# EAGLE board Gamebadge3_revB (EAGLE 8.7.1)
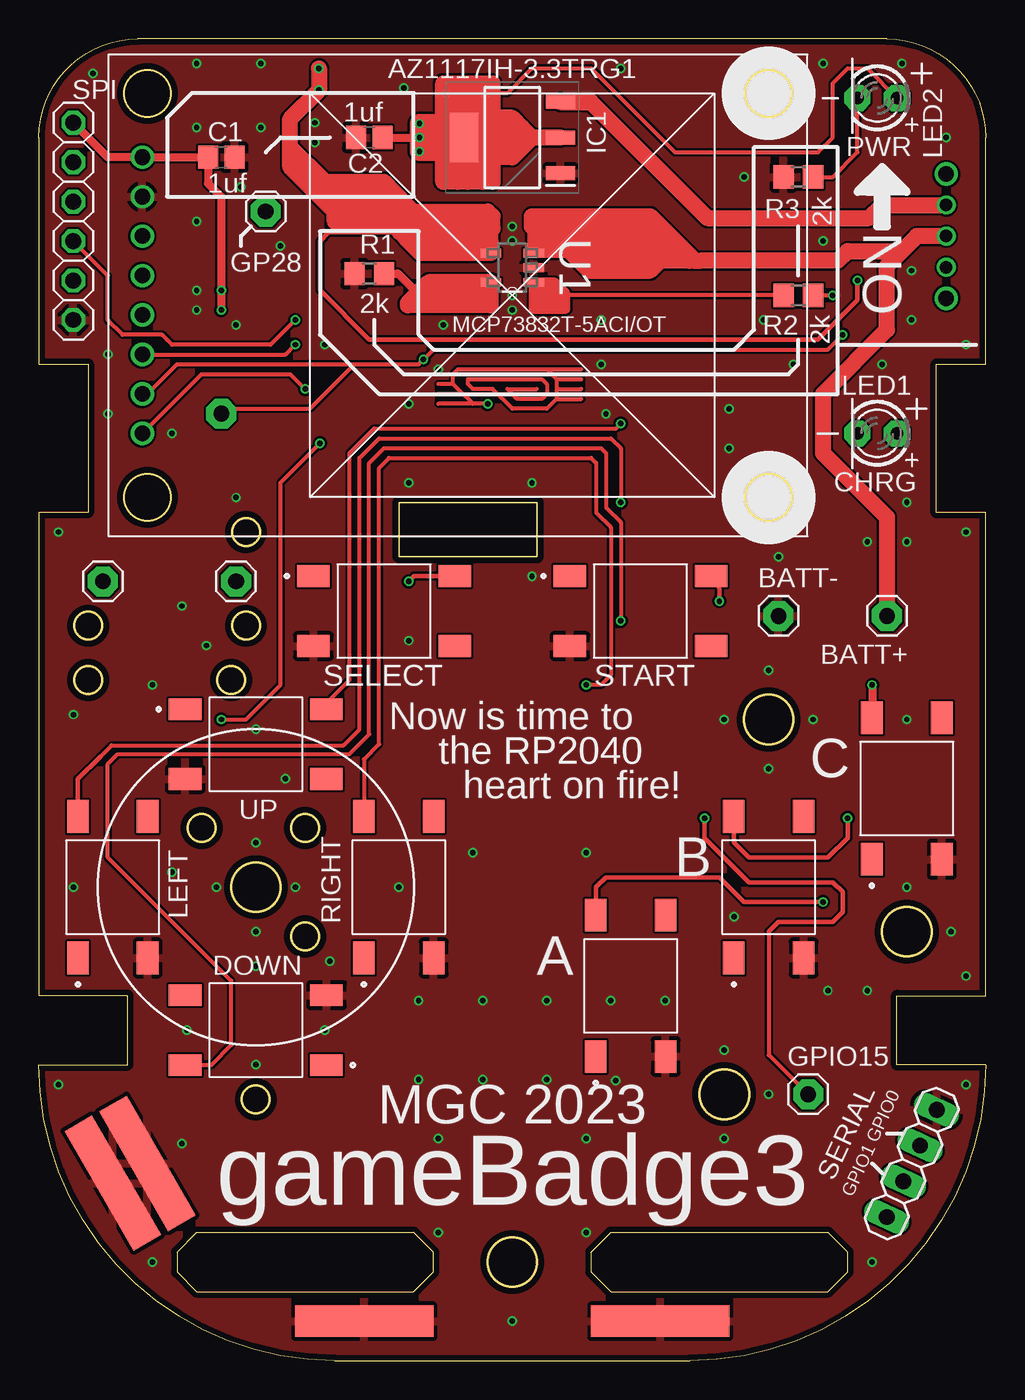
[diagram p0: board, top side]
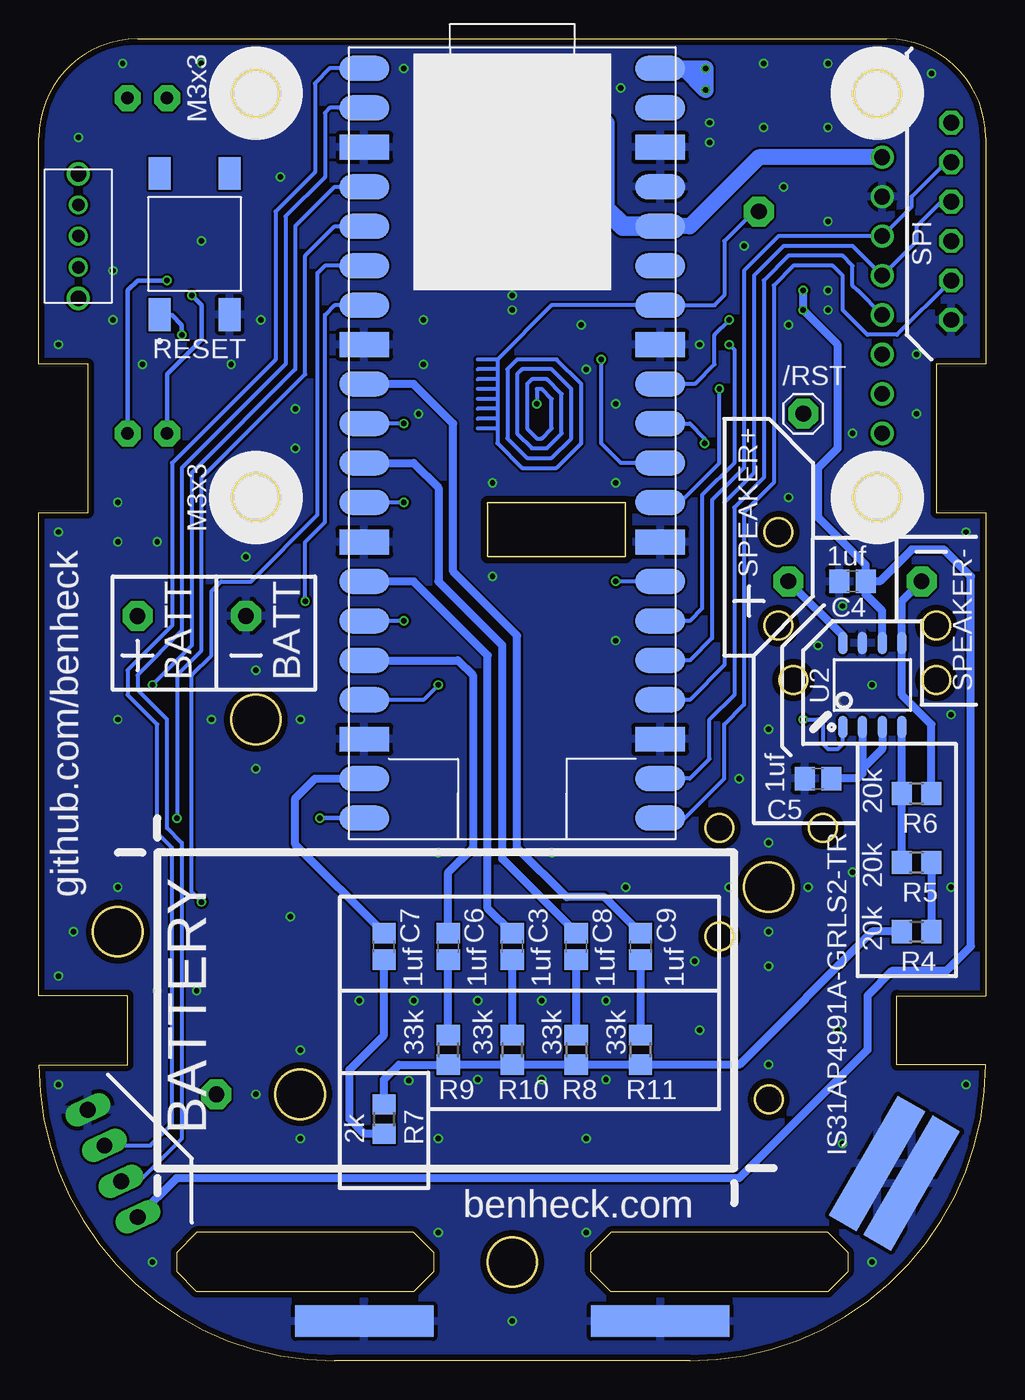
[diagram p1: board, bottom side, seen from below]

Size 60.96 x 85.09 mm. Coordinates in mm from the lower left corner, seen from the top.
Outline: 60.96,23.5 60.96,54.61 57.78,54.61 57.78,64.14 60.96,64.14 60.96,78.74 arc90 54.61,85.09 6.35,85.09 arc90 0,78.74 0,64.14 3.18,64.14 3.18,54.61 0,54.61 0,23.5 5.71,23.5 5.71,19.05 0,19.05 arc90 19.05,0 41.91,0 arc90 60.96,19.05 55.25,19.05 55.25,23.5 60.96,23.5
Outline: 36.83,8.26 50.8,8.26 52.07,6.98 52.07,5.72 50.8,4.45 36.83,4.45 35.56,5.72 35.56,6.98 36.83,8.26
Outline: 10.16,8.26 24.13,8.26 25.4,6.98 25.4,5.72 24.13,4.45 10.16,4.45 8.89,5.72 8.89,6.98 10.16,8.26
Outline: 32.07,51.75 32.07,55.25 23.18,55.25 23.18,51.75 32.07,51.75
Outline: circle at 13.97,30.48 radius 1.59
Outline: circle at 30.48,6.35 radius 1.59
Outline: circle at 55.88,27.62 radius 1.59
Outline: circle at 46.99,41.28 radius 1.59
Outline: circle at 44.13,17.15 radius 1.59
Outline: circle at 13.34,47.31 radius 0.89
Outline: circle at 12.38,43.82 radius 0.89
Outline: circle at 3.18,47.31 radius 0.89
Outline: circle at 3.18,43.82 radius 0.89
Outline: circle at 13.34,53.34 radius 0.89
Outline: circle at 17.14,34.29 radius 0.89
Outline: circle at 17.14,27.31 radius 0.89
Outline: circle at 13.97,16.83 radius 0.89
Outline: circle at 10.48,34.29 radius 0.89
Copper layers (1*16): Top 0.035559375mm / dielectric 1.6mm / Bottom 0.035559375mm
Design rules "oshpark-2layer": minimum track width 6mil, minimum drill 10mil, track to track 6mil, track to pad 6mil, pad to pad 6mil, via to via 6mil, smd to smd 6mil, copper to edge 15mil, drill to drill 6mil, minimum pad ring 5mil, minimum via ring 5mil, stop-mask expansion 2.5mil, vias tented up to drill 0mil, thermal gap 10mil

## Footprints (pad centres in the part's own frame; a part is rotated, then mirrored left to right if it is on the bottom)
1X01 = drill 1.016 pad 1.93 octagon: 1 0,0
SW_TS04-66-50-BK-100-SMT = smd 2.1 x 1.4: 1 -4.55,2.25; 2 -4.55,-2.25; 3 4.55,2.25; 4 4.55,-2.25
C0805 = smd 1.3 x 1.5: 1 -0.85,0; 2 0.85,0
SOT230P700X170-4N = smd 1.85 x 0.9: 1 -3.1,2.3; 2 -3.1,0; 3 -3.1,-2.3 | smd 1.85 x 3.2: 4 3.1,0
LED3MM = drill 0.813 pad 1.676 octagon: A -1.27,0; K 1.27,0
R0805 = smd 1.3 x 1.5: 1 -0.95,0; 2 0.95,0
1X04 = drill 1.016 long: 1 -3.81,0; 2 -1.27,0; 3 1.27,0; 4 3.81,0
1X06 = drill 1.016 octagon: 1 -6.35,0; 2 -3.81,0; 3 -1.27,0; 4 1.27,0; 5 3.81,0; 6 6.35,0
SOT95P300X145-5N = smd 1.321 x 0.559: 1 -1.372,0.94; 2 -1.372,0; 3 -1.372,-0.94; 4 1.372,-0.94; 5 1.372,0.94
SOIC127P604X170-8N = smd 1.45 x 0.6: 1 -2.7,1.905; 2 -2.7,0.635; 3 -2.7,-0.635; 4 -2.7,-1.905; 5 2.7,-1.905; 6 2.7,-0.635; 7 2.7,0.635; 8 2.7,1.905
GND_CLIP = smd 8.89 x 2.032: P$1 0,0 | smd 8.89 x 2.032 bottom: P$2 0,0
1825232-1 = drill 0.8: 1 -2,0; 2 0,0; 3 2,0 | drill 1: GND -4,0; GND1 4,0
ST7789_WAVE = drill 1: P$1 -23.82,8.89; P$2 -23.82,6.35; P$3 -23.82,3.81; P$4 -23.82,1.27; P$5 -23.82,-1.27; P$6 -23.82,-3.81; P$7 -23.82,-6.35; P$8 -23.82,-8.89
RPI_PICO_W = smd 3.2 x 1.6: 3V3 9.525,13.97; 3V3_EN 9.525,16.51; ADC_VREF 9.525,11.43; AGND 9.525,6.35; GND@1 -9.525,19.05; GND@2 -9.525,6.35; GND@3 -9.525,-6.35; GND@4 -9.525,-19.05; GND@6 9.525,-19.05; GND@7 9.525,-6.35; GND@8 9.525,19.05; GP0 -9.525,24.13; GP1 -9.525,21.59; GP2 -9.525,16.51; GP3 -9.525,13.97; GP4 -9.525,11.43; GP5 -9.525,8.89; GP6 -9.525,3.81; GP7 -9.525,1.27; GP8 -9.525,-1.27; GP9 -9.525,-3.81; GP10 -9.525,-8.89; GP11 -9.525,-11.43; GP12 -9.525,-13.97; GP13 -9.525,-16.51; GP14 -9.525,-21.59; GP15 -9.525,-24.13; GP16 9.525,-24.13; GP17 9.525,-21.59; GP18 9.525,-16.51; GP19 9.525,-13.97; GP20 9.525,-11.43; GP21 9.525,-8.89; GP22 9.525,-3.81; GP26_A0 9.525,1.27; GP27_A1 9.525,3.81; GP28_A2 9.525,8.89; RUN 9.525,-1.27; VBUS 9.525,24.13; VSYS 9.525,21.59

## Placement (x,y rotation side)
/RST  [1X01]  11.75,60.96 0 bottom
A  TS04-66-50-BK-100-SMT  [SW_TS04-66-50-BK-100-SMT]  38.1,24.13 90 top
B  TS04-66-50-BK-100-SMT  [SW_TS04-66-50-BK-100-SMT]  46.99,30.48 90 top
BATT+  [1X01]  54.61,47.94 180 top
BATT-  [1X01]  47.62,47.94 0 top
C  TS04-66-50-BK-100-SMT  [SW_TS04-66-50-BK-100-SMT]  55.88,36.83 90 top
C1  1uf  [C0805]  11.75,77.47 0 top
C2  1uf  [C0805]  21.27,78.74 180 top
C3  1uf  [C0805]  30.48,26.67 270 bottom
C4  1uf  [C0805]  8.57,50.17 180 bottom
C5  1uf  [C0805]  10.8,37.47 180 bottom
C6  1uf  [C0805]  34.61,26.67 270 bottom
C7  1uf  [C0805]  38.73,26.67 270 bottom
C8  1uf  [C0805]  26.35,26.67 270 bottom
C9  1uf  [C0805]  22.23,26.67 270 bottom
DOWN  TS04-66-50-BK-100-SMT  [SW_TS04-66-50-BK-100-SMT]  13.97,21.27 180 top
GP28  [1X01]  14.61,73.98 0 top
GPIO15  [1X01]  49.53,17.15 0 top
IC1  AZ1117IH-3.3TRG1  [SOT230P700X170-4N]  30.48,78.74 180 top
LED1  CHRG  [LED3MM]  53.98,59.69 180 top
LED2  PWR  [LED3MM]  53.98,81.28 180 top
LEFT  TS04-66-50-BK-100-SMT  [SW_TS04-66-50-BK-100-SMT]  4.76,30.48 90 top
R1  2k  [R0805]  21.27,69.98 0 top
R2  2k  [R0805]  48.89,68.58 180 top
R3  2k  [R0805]  48.89,76.2 180 top
R4  20k  [R0805]  4.45,27.62 180 bottom
R5  20k  [R0805]  4.45,32.07 0 bottom
R6  20k  [R0805]  4.45,36.51 0 bottom
R7  2k  [R0805]  38.73,15.56 270 bottom
R8  33k  [R0805]  26.35,20 90 bottom
R9  33k  [R0805]  34.61,20 90 bottom
R10  33k  [R0805]  30.48,20 90 bottom
R11  33k  [R0805]  22.23,20 90 bottom
RESET  TS04-66-50-BK-100-SMT  [SW_TS04-66-50-BK-100-SMT]  50.93,71.88 90 bottom
RIGHT  TS04-66-50-BK-100-SMT  [SW_TS04-66-50-BK-100-SMT]  23.18,30.48 90 top
SELECT  TS04-66-50-BK-100-SMT  [SW_TS04-66-50-BK-100-SMT]  22.23,48.26 0 top
SERIAL  [1X04]  56.2,12.7 65 top
SPEAKER+  [1X01]  12.7,50.17 0 top
SPEAKER-  [1X01]  4.13,50.17 0 top
SPI  [1X06]  2.22,73.34 270 top
START  TS04-66-50-BK-100-SMT  [SW_TS04-66-50-BK-100-SMT]  38.73,48.26 0 top
U1  MCP73832T-5ACI/OT  [SOT95P300X145-5N]  30.48,70.36 180 top
U2  IS31AP4991A-GRLS2-TR  [SOIC127P604X170-8N]  7.3,43.5 90 bottom
U$2  GND_CLIP  [GND_CLIP]  20.95,2.54 0 top
U$3  GND_CLIP  [GND_CLIP]  40.01,2.54 0 top
U$4  GND_CLIP  [GND_CLIP]  6.98,12.7 300 top
U$5  GND_CLIP  [GND_CLIP]  4.76,11.43 300 top
U$6  1825232-1  [1825232-1]  58.42,72.39 90 bottom
U$7  ST7789_CS  [ST7789_WAVE]  30.48,68.58 0 top
U$8  [RPI_PICO_W]  30.48,59.05 0 bottom
UP  TS04-66-50-BK-100-SMT  [SW_TS04-66-50-BK-100-SMT]  13.97,39.69 0 top

## Library data of the parts
/RST BATT+ BATT- C1-C9 GP28 GPIO15 LED1 LED2 SPEAKER+ SPEAKER- SPI = adafruit
A B C DOWN LEFT RESET RIGHT SELECT START UP = TS04-66-50-BK-100-SMT; AVAILABILITY: In Stock; CUI_PURCHASE_URL: https://www.cuidevices.com/product/switches/tactile-switches/ts04-series?utm_source=snapeda.com&utm_medium=referral&utm_campaign=snapedaBOM; DESCRIPTION: 6 x 6 mm, 4.3~9.5 mm Actuator Height, 100~260 gf, Surface Mount, SPST, Tactile Switch; MF: CUI Devices; MP: TS04-66-50-BK-100-SMT; PACKAGE: None; PRICE: None; PURCHASE-URL: https://pricing.snapeda.com/search/part/TS04-66-50-BK-100-SMT/?ref=eda
IC1 = AZ1117IH-3.3TRG1; AVAILABILITY: In Stock; DESCRIPTION: Linear Voltage Regulator IC Positive Fixed 1 Output 1A SOT-223-3; MF: Diodes Inc.; MP: AZ1117IH-3.3TRG1; PACKAGE: SOT-223 Diodes Inc.; PRICE: None; PURCHASE-URL: https://pricing.snapeda.com/search/part/AZ1117IH-3.3TRG1/?ref=eda
R1-R11 = resistor
SERIAL = pinhead
U1 = MCP73832T-5ACI_OT; AVAILABILITY: In Stock; DESCRIPTION: Charger IC Lithium Ion/Polymer SOT-23-5; MF: Microchip; MP: MCP73832T-5ACI/OT; PACKAGE: SOT-23 Microchip; PRICE: None; PURCHASE-URL: https://pricing.snapeda.com/search/part/MCP73832T-5ACI/OT/?ref=eda
U2 = IS31AP4991A-GRLS2-TR; AVAILABILITY: In Stock; DESCRIPTION: Audio Amp Speaker 1-CH Mono 1.4W Class-AB 8-Pin SOP T/R; MF: Lumissil Microsystems; MP: IS31AP4991A-GRLS2-TR; PACKAGE: None; PRICE: None; PURCHASE-URL: https://pricing.snapeda.com/search/part/IS31AP4991A-GRLS2-TR/?ref=eda
U$2-U$5 U$7 = MGC 2023
U$6 = switch 1825232-1; AVAILABILITY: In Stock; COMMENT: 1825232-1; DESCRIPTION: Switch Slide ON None ON SPDT Side Slide 0.2A 30VDC 10000Cycle PC Pins Bracket Mount/Through Hole; EU_ROHS_COMPLIANCE: Compliant; MF: TE Connectivity; MP: 1825232-1; PACKAGE: None; PRICE: None; PURCHASE-URL: https://pricing.snapeda.com/search/part/1825232-1/?ref=eda
U$8 = RaspberryPi_Pico W

## Nets
3V3: C1.1 C2.1 C4.1 IC1.2 IC1.4 LED2.A SERIAL.1 SPI.1 U2.6 U$7.P$1 U$8.3V3
A: A.3 U$8.GP4
ADC2: GP28.1 U$8.GP28_A2
AMP_EN: U2.1 U$8.GP26_A0
AUDIO: R4.2 R7.1 R8.1 R9.1 R10.1 R11.1
B: B.3 U$8.GP3
C: C.3 U$8.GP2
CHRG: LED1.K R2.1
DOWN: DOWN.3 U$8.GP11
GND: A.2 B.2 BATT-.1 C1.2 C2.2 C4.2 C5.2 C.2 DOWN.2 IC1.1 LEFT.2 R1.1 R3.2 RESET.2 RIGHT.2 SELECT.2 SERIAL.4 SPI.6 START.2 U1.2 U2.7 U$2.P$1 U$2.P$2 U$3.P$1 U$3.P$2 U$4.P$1 U$4.P$2 U$5.P$1 U$5.P$2 U$7.P$2 U$8.3V3_EN U$8.AGND U$8.GND@1 U$8.GND@2 U$8.GND@3 U$8.GND@4 U$8.GND@6 U$8.GND@7 U$8.GND@8 UP.2
LCD/CS: U$7.P$5 U$8.GP17
LEFT: LEFT.3 U$8.GP9
N$1: C5.1 U2.2 U2.3
N$2: /RST.1 RESET.1 U$7.P$7 U$8.RUN
N$3: U$7.P$6 U$8.GP20
N$4: R4.1 R5.2
N$5: U$7.P$8 U$8.GP22
N$6: R5.1 R6.1 U2.4
N$7: IC1.3 U$6.3
N$8: R6.2 SPEAKER-.1 U2.5
N$9: LED2.K R3.1
N$10: SPEAKER+.1 U2.8
N$11: C6.1 U$8.GP12
N$12: C7.1 U$8.GP14
N$13: C3.1 U$8.GP10
N$14: C6.2 R9.2
N$15: C7.2 R7.2
N$16: C8.1 U$8.GP8
N$17: C8.2 R8.2
N$18: C3.2 R10.2
N$20: U$8.ADC_VREF
N$21: GPIO15.1 U$8.GP15
N$22: C9.1 U$8.GP6
N$23: C9.2 R11.2
PROG: R1.2 U1.5
RIGHT: RIGHT.3 U$8.GP13
RX/SCL: SERIAL.2 U$8.GP1
SELECT: SELECT.3 U$8.GP21
SPI0_CLK: SPI.3 U$7.P$4 U$8.GP18
SPI0_MISO: SPI.5 U$8.GP16
SPI0_MOSI: SPI.2 U$7.P$3 U$8.GP19
SPI/CS: SPI.4 U$8.GP27_A1
START: START.3 U$8.GP5
STAT: R2.2 U1.1
TX/SDA: SERIAL.3 U$8.GP0
UP: U$8.GP7 UP.3
VBAT: BATT+.1 U1.3 U$6.2
VDD: LED1.A U1.4 U$8.VBUS

## Tracks (layer width: path | path; a pad name or v marks a point on that pad's centre or on a via)
3V3  (via drill 0.35)
  Top 0.254: LED2.A 53.34,83.19 52.07,83.19 51.12,82.23 51.12,78.74 50.16,77.79 40.96,77.79 35.56,83.19 31.75,83.19 30.16,81.6 28.57,81.6
  Top 0.508: C2.1 v24.51,78.74 | SPI.1 4.45,77.47 U$7.P$1 C1.1 10.9,75.78 11.75,74.93 v11.75,68.9 v11.75,67.63
  Top 1.016: 31.75,78.74 26.04,78.74 | IC1.2 31.75,78.74 | 31.12,79.38 30.48,80.01 27.94,80.01 27.56,79.63 | IC1.4 28.02,79.38 31.12,79.38 | 31.12,79.38 31.75,78.74 | 31.75,78.74 30.48,77.47 27.94,77.47 27.94,78.11 30.48,78.11 | 26.04,78.74 26.04,79.63 26.04,82.23 26.99,82.23 | 26.99,82.23 27.62,82.23 | 27.62,82.23 28.57,82.23 | 28.57,82.23 29.21,82.23 29.21,75.88 28.57,75.88 | 28.57,75.88 27.62,75.88 | 27.62,75.88 26.99,75.88 | 26.99,75.88 26.04,75.88 26.04,78.74 | 26.99,82.23 26.99,75.88 | 27.62,75.88 27.62,82.23 | 28.57,82.23 28.57,81.6 28.57,75.88
  Top 1.27: v24.51,78.74 26.04,78.74 26.8,78.74 | v24.51,78.74 v24.51,79.63 26.04,79.63 27.56,79.63 27.3,79.38 27.3,77.85 v24.51,77.85 v24.51,78.74
  Bottom 0.508: U2.6 6.67,48.26 7.72,49.32 C4.1 | C4.1 7.72,51.22 10.8,54.29 10.8,57.47 9.53,58.74 9.53,65.41 v11.75,67.63 v11.75,68.9 | SERIAL.1 52.09,11.75 15.88,11.75 7.62,20 7.62,23.5 6.03,25.08 2.54,25.08 0.95,26.67 0.95,50.48 2.7,52.23 4.76,52.23 6.83,50.17 C4.1
  Bottom 1.016: U$7.P$1 14.61,77.47 19.05,73.03 U$8.3V3
  Bottom 1.27: v24.51,79.63 v24.51,78.74 v24.51,77.85 24.51,74.17 23.37,73.03 U$8.3V3
A  (via drill 0.35)
  Top 0.305: A.3 35.88,28.71 35.88,30.48 36.51,31.12 43.81,31.12 45.4,29.53 v50.48,29.53
  Bottom 0.254: U$8.GP4 42.55,70.48 43.02,70.01 43.02,54.45 47.31,50.17 49.21,50.17 49.85,49.53 49.85,45.4 51.12,44.13 51.12,30.16 v50.48,29.53
ADC2  (via drill 0.35)
  Top 0.254: v28.89,61.59 27.94,61.59 | 27.94,61.59 27.15,62.39 | 27.15,62.39 26.67,62.87 | 32.7,63.82 33.34,63.18 | 33.34,63.18 33.34,62.55 | 33.34,62.55 33.34,61.91 | 33.34,61.91 32.7,61.28 30.48,61.28 29.21,62.55 27.94,62.55 27.62,62.87 27.62,63.18 32.38,63.18 32.7,62.87 32.7,62.23 32.38,61.91 30.8,61.91 30.16,62.55 32.07,62.55 | 26.67,62.87 26.67,63.5 26.99,63.82 32.7,63.82 | 32.7,63.82 34.92,63.82 | 33.34,63.18 34.92,63.18 | 33.34,62.55 34.92,62.55 | 33.34,61.91 34.92,61.91 | 27.94,61.59 25.72,61.59 | 27.15,62.39 26.99,62.23 25.72,62.23 | 26.67,62.87 25.72,62.87
  Bottom 0.254: 31.43,64.45 27.94,67.95 U$8.GP28_A2 17.46,67.95 16.83,68.58 16.83,72.07 14.92,73.98 GP28.1 | 31.43,64.45 31.43,63.82 | 31.43,63.82 31.43,63.18 | 31.43,63.18 31.43,62.55 | 31.43,62.55 31.43,61.91 | 31.43,61.91 31.43,61.28 | 31.43,61.28 31.43,60.64 | 31.43,60.64 31.43,60.01 | 31.43,60.01 31.43,59.05 29.84,57.47 27.62,57.47 26.04,59.05 26.04,62.87 27.62,64.45 30.16,64.45 30.8,63.82 30.8,59.37 29.53,58.1 27.94,58.1 26.67,59.37 26.67,62.55 27.94,63.82 29.84,63.82 30.16,63.5 30.16,59.69 29.21,58.74 28.26,58.74 27.3,59.69 27.3,62.23 28.26,63.18 29.21,63.18 29.53,62.87 29.53,60.01 28.89,59.37 28.57,59.37 27.94,60.01 27.94,61.91 28.57,62.55 28.89,62.55 v28.89,61.59 | 31.43,64.45 32.7,64.45 | 31.43,63.82 32.7,63.82 | 31.43,63.18 32.7,63.18 | 31.43,62.55 32.7,62.55 | 31.43,61.91 32.7,61.91 | 31.43,61.28 32.7,61.28 | 31.43,60.64 32.7,60.64 | 31.43,60.01 32.7,60.01
AMP_EN  (via drill 0.35)
  Top 0.254: v11.75,41.28 13.34,41.28 15.56,43.5 15.56,56.52 v18.1,59.05
  Bottom 0.254: U$8.GP26_A0 19.05,60.33 18.1,59.37 v18.1,59.05 | v11.75,41.28 10.8,41.28 10.48,40.96 10.48,39.69 10.16,39.37 9.53,39.37 9.21,39.69 U2.1
AUDIO
  Bottom 0.508: R4.2 7.3,27.62 15.87,19.05 R11.1 R8.1 R10.1 R9.1 37.78,19.05 38.73,18.1 R7.1
B  (via drill 0.35)
  Top 0.305: B.3 44.74,33.37 45.72,32.39 50.8,32.39 52.07,33.66 v52.07,34.93
  Top 0.508: 44.77,34.61 44.77,35 B.3
  Bottom 0.254: U$8.GP3 41.91,73.03 43.81,71.12 43.81,63.5 50.48,56.83 50.48,45.72 52.07,44.13 v52.07,34.93
C  (via drill 0.35)
  Top 0.508: v53.66,43.5 53.66,41.41 C.3
  Bottom 0.254: U$8.GP2 41.91,75.56 44.45,73.03 44.45,63.82 51.12,57.15 51.12,46.04 v53.66,43.5
CHRG  (via drill 0.35)
  Top 0.254: R2.1 v51.12,68.58
  Bottom 0.305: LED1.K 52.7,63.5 50.48,65.72 50.48,67.95 v51.12,68.58
DOWN  (via drill 0.35)
  Top 0.254: DOWN.3 11.09,19.02 12.38,20.32 12.38,24.45 4.45,32.39 4.45,38.42 5.08,39.05 20,39.05 21.27,40.32 21.27,57.79 22.23,58.74 36.2,58.74 36.51,58.42 36.51,54.93 37.47,53.98 v37.47,47.62
  Bottom 0.254: v37.47,47.62 U$8.GP11
GND  (via drill 0.35)
  other vias: 10.16,79.38 30.48,72.07 30.48,73.03 30.48,68.58 30.48,67.63 17.78,78.42 10.16,67.63 10.16,68.9 10.16,73.34 14.29,83.5 14.29,79.38 12.7,66.67 4.45,60.96 8.57,59.69 12.7,55.56 24.45,23.18 28.57,23.18 32.7,23.18 36.83,23.18 24.45,18.1 28.57,18.1 32.7,18.1 37.15,18.03 47.62,51.75 44.45,58.74 53.34,52.71 55.88,55.25 55.88,41.28 23.81,56.52 31.75,56.52 23.81,61.59 25.72,63.82 36.51,60.96 36.2,66.99 56.2,66.99 23.5,81.92 37.47,83.19 50.48,83.5 46.67,66.99 54.29,64.14 8.57,31.43 2.22,41.59 18.73,25.72 13.97,25.4 10.8,46.04 13.97,19.05 2.22,30.48 9.21,13.97 25.72,8.26 35.24,8.26 53.66,6.35 7.3,6.35 1.27,17.78 59.69,17.78 59.69,24.77 30.48,2.54 50.8,23.81 53.34,23.81 44.13,41.28 23.18,30.48 4.45,64.77 3.49,82.87 45.4,76.2 56.2,70.17 23.81,46.36 13.97,40.64 55.56,83.5 55.88,52.71 48.58,64.14 25.72,14.29 35.24,14.29 9.53,21.27 18.41,21.27 13.97,27.62 13.97,33.34 11.43,30.48 16.51,30.48 27.94,32.7 35.24,32.7 40.32,23.18 46.99,44.45 46.99,38.1 31.75,50.48 15.56,71.75 26.04,66.67 36.2,64.14 44.45,61.28 15.88,37.47 50.48,72.07 7.3,43.5 9.21,48.58 1.27,53.34 13.02,75.56 18.41,65.41 17.78,79.69 10.16,83.5 49.85,41.28 44.77,28.58 44.13,20 44.13,14.29 46.99,17.15 55.88,30.48 58.74,27.62 59.69,53.34 59.69,65.41 58.42,78.74
  pour Top: -12.7,96.52 78.74,96.52 78.74,-7.62 76.2,-10.16 -7.62,-10.16 -17.78,0 -17.78,91.44
  pour Bottom: -7.62,96.52 68.58,96.52 71.12,93.98 73.66,91.44 73.66,-7.62 68.58,-12.7 -10.16,-12.7 -15.24,-7.62 -15.24,93.98 -12.7,96.52
LCD/CS
  Bottom 0.254: U$7.P$5 8.25,68.9 8.57,69.22 8.57,70.48 9.21,71.12 12.7,71.12 14.29,69.53 14.29,56.83 16.19,54.93 16.19,42.86 17.78,41.28 17.78,38.73 19.05,37.47 U$8.GP17
LEFT  (via drill 0.35)
  Top 0.254: v37.47,55.25 37.47,58.74 36.83,59.37 21.91,59.37 20.64,58.1 20.64,40.64 19.61,39.61 4.68,39.61 3.97,38.89
  Top 0.305: LEFT.3 2.51,37.44 3.97,38.89
  Bottom 0.254: v37.47,55.25 U$8.GP9
N$1
  Bottom 0.508: U2.2 7.94,38.1 | 7.94,38.1 7.94,37.78 8.25,37.47 C5.1 | U2.3 6.67,39.37 7.94,38.1
N$2  (via drill 0.35)
  Top 0.254: U$7.P$7 6.98,62.23 8.89,64.14 20.32,64.14 | 20.32,64.14 24.45,64.14 v24.77,64.45 25.4,65.09 50.8,65.09 v51.75,66.04 | /RST.1 12.07,61.28 17.46,61.28 20.32,64.14
  Bottom 0.254: U$8.RUN 23.5,57.79 24.77,59.05 v24.77,64.45
  Bottom 0.305: v51.75,66.04 51.75,66.67 52.39,67.31 52.7,67.31
  Bottom 0.508: 52.7,67.31 53.16,67.31 RESET.1
N$3  (via drill 0.35)
  Top 0.254: U$7.P$6 15.88,64.77 v16.51,65.41
  Bottom 0.254: U$8.GP20 19.05,47.62 18.26,48.42 18.26,55.72 16.19,57.79 16.19,65.09 v16.51,65.41
N$4
  Bottom 0.508: R5.2 R4.1
N$5  (via drill 0.35)
  Top 0.254: v17.14,62.55 16.19,63.5 10.47,63.5 U$7.P$8
  Bottom 0.254: v17.14,62.55 17.14,57.79 19.69,55.25 U$8.GP22
N$6
  Bottom 0.508: R5.1 R6.1 U2.4
N$7
  Top 1.016: IC1.3 33.59,81.03 35.56,81.03 43.04,73.55 53.45,73.55 54.29,74.39 U$6.3
N$8
  Bottom 0.508: R6.2 3.5,40.96 5.4,42.86 U2.5 5.4,48.9 SPEAKER-.1
N$9
  Top 0.254: R3.1 51.12,76.2 52.7,77.79 LED2.K
N$10
  Bottom 0.508: U2.8 9.21,46.67 SPEAKER+.1
N$11
  Bottom 0.508: C6.1 34.61,31.43 33.02,33.02 33.02,44.13 33.97,45.09 U$8.GP12
N$12
  Bottom 0.508: C7.1 44.45,33.23 44.45,36.2 43.18,37.47 U$8.GP14 39.37,37.47
N$13
  Bottom 0.508: C3.1 32.07,29.11 32.07,45.4 36.83,50.17 U$8.GP10
N$14
  Bottom 0.508: R9.2 C6.2
N$15
  Bottom 0.508: R7.2 40,14.61 40.01,14.61 40.96,15.56 40.96,18.73 38.73,20.96 C7.2
N$16
  Bottom 0.508: C8.1 31.12,32.28 31.12,46.04 35.24,50.17 35.24,56.2 36.83,57.79 U$8.GP8
N$17
  Bottom 0.508: R8.2 C8.2
N$18
  Bottom 0.508: R10.2 C3.2
N$21  (via drill 0.35)
  Top 0.254: 47,27.59 47,19.68 GPIO15.1
  Top 0.305: 47,27.59 46.99,27.62 47.62,28.26 51.12,28.26 51.75,28.89 51.75,30.16 51.12,30.8 45.72,30.8 42.86,33.66 v42.86,34.93
  Bottom 0.305: v42.86,34.93 U$8.GP15
N$22
  Bottom 0.508: C9.1 24.55,29.85 26.99,29.85 30.16,33.02 30.16,46.67 34.29,50.8 34.29,60.33 36.83,62.87 U$8.GP6
N$23
  Bottom 0.508: C9.2 R11.2
PROG
  Top 0.254: 28.83,68.45 29.08,68.71
  Top 0.508: R1.2 23.11,69.98 24.38,68.71
  Top 1.016: 25.09,69.42 U1.5 29.08,69.39 29.08,68.71 | 25.09,69.42 24.38,68.71 | 24.38,68.71 29.08,68.71 | 29.08,68.71 29.08,67.95 23.75,67.95 | 23.75,67.95 25.09,69.29 25.09,69.42 | 24.38,68.71 23.75,68.07 23.75,67.95
RIGHT  (via drill 0.35)
  Top 0.254: RIGHT.3 20.93,38.71 21.91,39.69 21.91,57.47 22.54,58.1 35.56,58.1 35.88,57.79 35.88,54.61 36.83,53.66 36.83,44.13 36.2,43.5 v35.24,43.5
  Bottom 0.254: U$8.GP13 36.2,42.55 v35.24,43.5
RX/SCL
  Bottom 0.254: U$8.GP1 42.23,80.65 42.55,80.33 42.55,76.2 45.09,73.66 45.09,64.14 51.75,57.47 51.75,46.99 54.61,44.13 54.61,43.18 52.7,41.28 52.7,34.29 51.75,33.34 51.75,14.29 54.49,11.55 SERIAL.2
SELECT  (via drill 0.35)
  Top 0.305: SELECT.3 24.16,50.51 v23.81,50.17
  Bottom 0.254: U$8.GP21 v23.81,50.17
SPI0_CLK
  Bottom 0.254: U$8.GP18 19.05,42.55 16.83,44.77 16.83,55.25 14.92,57.15 14.92,69.85 13.02,71.75 8.57,71.75 U$7.P$4 4.45,72.06 4.45,73.03 2.86,74.61 SPI.3
SPI0_MISO
  Bottom 0.254: U$8.GP16 19.37,34.93 16.83,37.47 16.83,40.96 15.56,42.23 15.56,54.61 13.65,56.52 13.65,69.22 12.38,70.48 9.84,70.48 9.21,69.85 9.21,67.63 7.62,66.04 5.71,66.04 SPI.5
SPI0_MOSI
  Bottom 0.254: U$8.GP19 19.05,45.09 17.62,46.51 17.62,55.4 15.56,57.47 15.56,70.17 13.34,72.39 U$7.P$3 4.76,74.29 4.76,74.93 2.54,77.15 SPI.2
SPI/CS  (via drill 0.35)
  Top 0.254: v16.51,66.99 14.92,65.41 8.57,65.41 8.25,65.72 | 8.25,65.72 7.94,66.04 5.4,66.04 4.45,66.99 4.45,69.85 SPI.4 | 8.25,65.72
  Bottom 0.254: v16.51,66.99 17.46,66.04 17.46,64.14 18.73,62.87 U$8.GP27_A1
START  (via drill 0.35)
  Top 0.305: v43.81,48.9 43.77,50.53 43.45,50.43 43.28,50.58 START.3
  Bottom 0.254: U$8.GP5 41.91,67.95 42.55,67.31 42.55,53.98 43.81,52.71 v43.81,48.9
STAT
  Top 0.254: R2.2 33.15,68.58 33.02,68.71
  Top 0.305: 33.34,68.71 33.47,68.58
  Top 0.508: 33.27,69.22 33.02,68.96 | 33.4,68.58 33.02,68.2
  Top 0.61: 31.85,68.96 U1.1 33.2,69.42 33.53,69.09 | 31.85,68.96 31.85,68.58 | 31.85,68.58 31.85,68.2 | 31.85,68.2 31.85,67.72 31.88,67.69 33.91,67.69 33.91,68.2 | 33.91,68.71 33.91,68.2 | 33.53,69.09 33.91,68.71 | 31.85,68.96 33.02,68.96 33.4,68.96 33.53,69.09 | 33.91,68.71 33.34,68.71 33.02,68.71 31.98,68.71 31.85,68.58 | 31.85,68.2 33.02,68.2 33.91,68.2
TX/SDA
  Bottom 0.254: U$8.GP0 42.23,83.19 43.18,82.23 43.18,76.52 45.72,73.98 45.72,64.45 52.39,57.79 52.39,47.31 55.25,44.45 55.25,42.86 53.34,40.96 53.34,33.97 52.39,33.02 52.39,15.24 53.78,13.85 SERIAL.3
UP  (via drill 0.35)
  Top 0.254: 18.55,41.91 18.55,42.36 20,43.82 20,58.42 21.59,60.01 37.15,60.01 v37.47,60.33
  Top 0.508: 18.55,41.91 UP.3
  Bottom 0.254: v37.47,60.33 U$8.GP7
VBAT
  Top 0.508: 35.18,71.75 34.8,72.14 | 35.88,71.3 35.56,71.62 35.56,71.88 | 35.43,71.75 35.56,71.88 | 35.56,71.88 35.56,71.95
  Top 0.61: 34.86,72.45 34.92,72.39 34.99,72.33 34.8,72.14 31.75,72.14 | 34.86,72.45 34.61,72.71 34.29,73.03 31.75,73.03 31.75,72.52 | 31.75,72.52 31.75,72.14 | 31.75,72.14 31.75,71.75 | 31.75,71.75 31.75,71.4 U1.3 34.29,71.3 35.24,71.3 35.88,71.3 36.5,71.3 | 35.5,71.82 35.43,71.75 | 34.86,72.45 33.78,72.45 31.81,72.45 31.75,72.52 | 31.75,72.14 31.94,71.95 35.56,71.95 36.45,71.95 36.26,71.75 35.18,71.75 31.75,71.75
  Top 1.016: 33.97,72.64 33.78,72.45 | 34.61,72.71 34.92,72.39 36.2,72.39 | U$6.2 56.52,72.39 55.56,71.44 | 31.75,73.03 31.75,73.66 34.92,73.66 | 55.56,71.44 54.61,70.48 54.61,66.36 50.48,62.23 50.48,58.42 54.61,54.29 BATT+.1 | 34.92,73.66 35.72,72.87 | 35.72,72.87 36.2,72.39 | 36.2,72.39 37.29,71.3 35.88,71.3 36.05,71.12 | 37.78,72.39 36.2,72.39 | 34.92,73.66 36.51,73.66 | 36.51,73.66 37.31,72.87 | 37.31,72.87 37.78,72.39 | 37.78,72.39 39.05,71.12 | 39.05,71.12 36.05,71.12 | 35.72,72.87 36.67,72.87 37.78,71.75 | 39.05,71.12 39.37,70.8 40.01,70.8 | 42.23,70.8 41.91,70.8 | 41.91,70.8 40.01,70.8 | 55.56,71.44 52.07,71.44 51.44,70.8 42.55,70.8 42.23,70.8 | 34.29,71.3 35.42,70.17 39.37,70.17 40.01,70.8 | 36.05,71.12 35.42,71.12 35.24,71.3 | 36.51,73.66 38.73,73.66 | 41.91,70.8 41.27,71.44 40.96,71.44 38.73,73.66 | 40.01,70.8 40.01,71.44 38.42,73.03 38.26,72.87 37.31,72.87 | 38.73,73.66 39.37,73.66 42.23,70.8
VDD  (via drill 0.35)
  Top 0.305: v52.7,69.53 52.7,68.26 50.16,65.72 21.27,65.72 18.1,68.9 18.1,72.07 18.67,72.64 23.24,72.64
  Top 1.016: 23.94,71.95 24.59,71.3 U1.4 29.08,71.32 29.08,72.01 | 23.94,71.95 23.24,72.64 | 23.24,72.64 22.7,73.18 | 22.7,73.18 22.23,73.66 29.21,73.66 | 29.08,72.01 24,72.01 23.94,71.95 | 29.08,72.01 29.08,72.77 | 29.08,72.77 23.37,72.77 23.24,72.64 | 29.08,72.77 29.21,72.9 29.21,73.66 | 16.19,78.11 18.41,75.88 | 18.41,75.88 20.32,73.98 | 20.32,73.98 23.18,73.98 | 23.18,73.98 24.13,73.98 | 24.13,73.98 28.89,73.98 29.21,73.66 | v18.03,83.19 v18.03,81.79 16.19,79.95 16.19,78.11 | 20.32,73.98 21.11,73.18 | 21.11,73.18 22.7,73.18 | 18.41,75.88 22.23,75.88 22.54,75.56 | 22.54,75.56 24.13,73.98 | 22.54,75.56 20.32,75.56 20,75.25 20,74.93 20.32,74.61 22.54,74.61 23.18,73.98 | 21.11,73.18 19.21,73.18 19.05,73.34 19.05,73.98 | 19.05,73.98 16.19,76.84 16.19,78.11 | 19.05,73.98 19.37,73.66 19.69,73.66
  Bottom 0.305: v52.7,69.53 54.61,69.53 55.25,68.9 LED1.A
  Bottom 1.016: U$8.VBUS v18.03,83.19 v18.03,81.79 19.43,83.19 U$8.VBUS

## Text on the board
tPlace: ON | Now is time to | the RP2040 | heart on fire! | MGC 2023 | gameBadge3 | GPIO0 | GPIO1
bPlace: M3x3 | SPI | M3x3 | BATT | BATT | github.com/benheck | BATTERY | benheck.com